# EAGLE board GlucometerV2.2 (EAGLE 7.2.0)
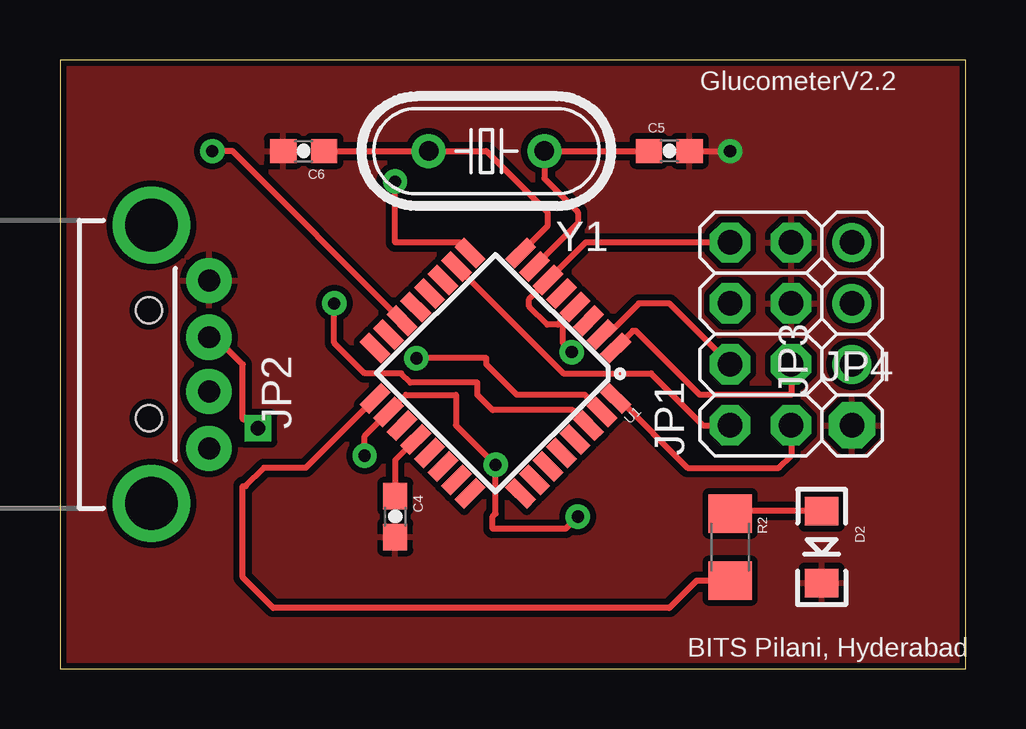
[diagram p0: board, top side]
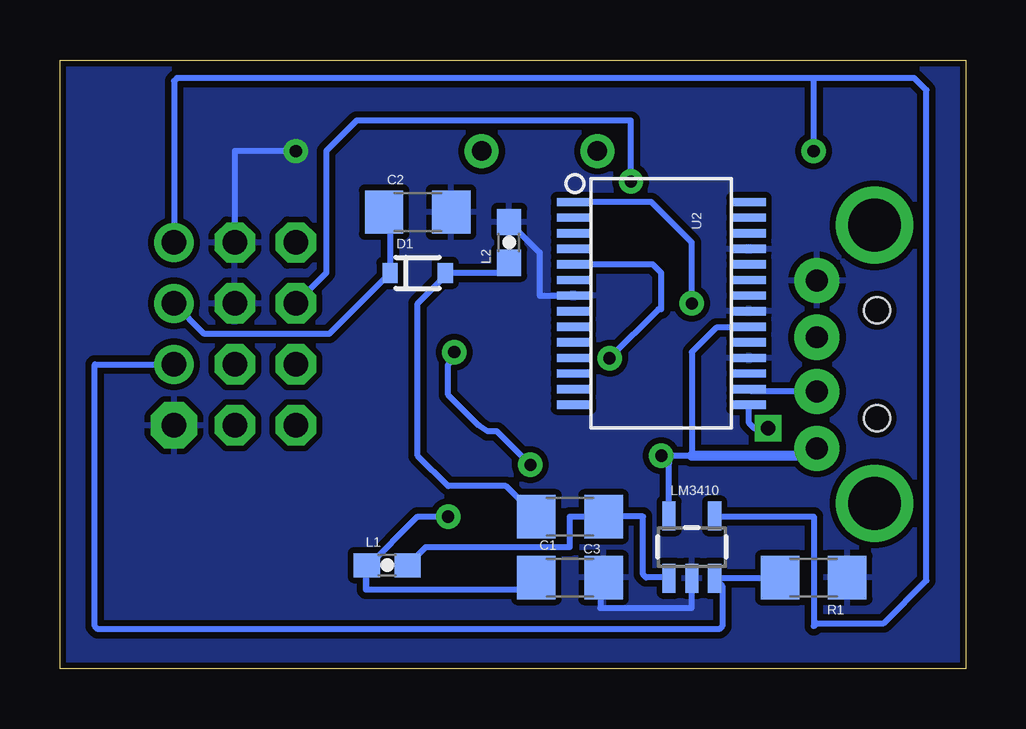
[diagram p1: board, bottom side, seen from below]

Size 37.77 x 25.39 mm. Coordinates in mm from the lower left corner, seen from the top.
Outline: 0,0 37.77,0 37.77,25.39 0,25.39 0,0
Copper layers (1*16): Top 0.035mm / dielectric 1.5mm / Bottom 0.035mm
Design rules "SparkFun": minimum track width 8mil, minimum drill 20mil, track to track 8mil, track to pad 8mil, pad to pad 8mil, via to via 8mil, smd to smd 8mil, copper to edge 8mil, drill to drill 8mil, minimum pad ring 12mil, minimum via ring 10mil, stop-mask expansion 4mil, vias tented up to drill 20mil, thermal gap 10mil

## Footprints (pad centres in the part's own frame; a part is rotated, then mirrored left to right if it is on the bottom)
1206 = smd 1.6 x 1.8: 1 -1.4,0; 2 1.4,0
0603-CAP = smd 1.1 x 1: 1 -0.85,0; 2 0.85,0
SOD-323 = smd 0.63 x 0.83: A 1.15,0; C -1.15,0
LED-1206 = smd 1.2 x 1.4: A -1.5,0; C 1.5,0
2X04 = drill 1.016 pad 1.676 octagon: 1 -3.81,-1.27; 2 -3.81,1.27; 3 -1.27,-1.27; 4 -1.27,1.27; 5 1.27,-1.27; 6 1.27,1.27; 7 3.81,-1.27; 8 3.81,1.27
USB-A-H = drill 0.914 pad 1.88: D+ 2.4,1.127; D- 2.4,-1.127; GND 2.4,3.5; VBUS 2.4,-3.5 | drill 2.2: GND2 0,-5.8; GND3 0,5.8 | hole 1.1: -0.1,2.25; -0.1,-2.25
1X03 = drill 1.016: 1 -2.54,0; 2 0,0; 3 2.54,0
1X01 = drill 1.016 pad 1.93 octagon: 1 0,0
0603 = smd 1.1 x 1: 1 -0.85,0; 2 0.85,0
SOT23-5 = smd 0.55 x 1.2: 1 -0.95,-1.3; 2 0,-1.3; 3 0.95,-1.3; 4 0.95,1.3; 5 -0.95,1.3
TQFP32-08 = smd 1.27 x 0.559: 1 -4.293,2.8; 2 -4.293,2; 3 -4.293,1.2; 4 -4.293,0.4; 5 -4.293,-0.4; 6 -4.293,-1.2; 7 -4.293,-2; 8 -4.293,-2.8; 17 4.293,-2.8; 18 4.293,-2; 19 4.293,-1.2; 20 4.293,-0.4; 21 4.293,0.4; 22 4.293,1.2; 23 4.293,2; 24 4.293,2.8 | smd 0.559 x 1.27: 9 -2.8,-4.293; 10 -2,-4.293; 11 -1.2,-4.293; 12 -0.4,-4.293; 13 0.4,-4.293; 14 1.2,-4.293; 15 2,-4.293; 16 2.8,-4.293; 25 2.8,4.293; 26 2,4.293; 27 1.2,4.293; 28 0.4,4.293; 29 -0.4,4.293; 30 -1.2,4.293; 31 -2,4.293; 32 -2.8,4.293
SSOP28DB = smd 0.348 x 1.397: 1 -4.225,-3.656; 2 -3.575,-3.656; 3 -2.925,-3.656; 4 -2.275,-3.656; 5 -1.625,-3.656; 6 -0.975,-3.656; 7 -0.325,-3.656; 8 0.325,-3.656; 9 0.975,-3.656; 10 1.625,-3.656; 11 2.275,-3.656; 12 2.925,-3.656; 13 3.575,-3.656; 14 4.225,-3.656; 15 4.225,3.656; 16 3.575,3.656; 17 2.925,3.656; 18 2.275,3.656; 19 1.625,3.656; 20 0.975,3.656; 21 0.325,3.656; 22 -0.325,3.656; 23 -0.975,3.656; 24 -1.625,3.656; 25 -2.275,3.656; 26 -2.925,3.656; 27 -3.575,3.656; 28 -4.225,3.656
HC49U-V = drill 0.813: 1 -2.413,0; 2 2.413,0

## Placement (x,y rotation side)
C1  10uF  [1206]  16.51,3.81 0 bottom
C2  10uF  [1206]  22.86,19.05 0 bottom
C3  2.2uF  [1206]  16.51,6.35 180 bottom
C4  0.1uF  [0603-CAP]  13.97,6.35 270 top
C5  0.1uF  [0603-CAP]  25.4,21.59 0 top
C6  0.1uF  [0603-CAP]  10.16,21.59 180 top
D1  5.6V  [SOD-323]  22.86,16.51 0 bottom
D2  RED  [LED-1206]  31.75,5.08 270 top
JP1  [2X04]  29.21,13.97 90 top
JP2  USB-A-H  [USB-A-H]  3.81,12.7 0 top
JP3  [1X03]  33.02,15.24 90 top
JP4  [1X01]  33.02,10.16 0 top
L1  4.7uH  [0603]  24.13,4.32 0 bottom
L2  4.7uH  [0603]  19.05,17.78 90 bottom
LM3410  TC7SU04F  [SOT23-5]  11.43,5.08 0 bottom
R1  [1206]  6.35,3.81 180 bottom
R2  [1206]  27.94,5.08 270 top
U1  ATMEGA328P_TQFP  [TQFP32-08]  18.15,12.33 225 top
U2  FT232RLSSOP  [SSOP28DB]  12.7,15.24 270 bottom
Y1  [HC49U-V]  17.78,21.59 180 top

## Library data of the parts
C1-C3 = SparkFun-Passives
C4-C6 = SparkFun-Capacitors; PROD_ID: CAP-00810
D1 = SparkFun-DiscreteSemi; PROD_ID: DIO-12442
D2 = SparkFun-LED; PROD_ID: DIO-00809
JP1 JP3 JP4 = adafruit
JP2 = SparkFun-Connectors; PROD_ID: CONN-08367
L1 L2 = SparkFun-Passives; PROD_ID: RES-07859
LM3410 = SparkFun-DigitalIC; NOTE: RETIRED; PROD_ID: 8211
R1 R2 = SparkFun-Resistors
U1 = SparkFun-DigitalIC; PROD_ID: IC-09069
U2 = SparkFun-DigitalIC; PROD_ID: IC-00870
Y1 = SparkFun-FreqCtrl

## Nets
D+: JP2.D+ U2.15
D-: JP2.D- U2.16
FB: JP3.1 LM3410.3 R1.2
GND: C1.2 C2.2 C4.2 C5.2 C6.2 D2.C JP1.5 JP1.7 JP2.GND JP4.1 L2.2 LM3410.2 R1.1 U1.3 U1.21 U2.7 U2.18 U2.21 U2.25
IND: R2.2 U1.17
N$1: C4.1 U1.20
N$2: D2.A R2.1
N$3: C5.1 U1.7 Y1.1
N$5: C6.1 U1.8 Y1.2
PWM: JP3.3 LM3410.4 U1.14
RX: U1.30 U2.1
S0: JP1.1 U1.32
S1: JP1.3 U1.1
S2: JP1.4 U1.2
S3: JP1.2 U1.10
SENSOROUT: JP1.6 U1.9
SWITCH: C3.1 L1.2 LM3410.1
TMP0: C3.2 D1.A L2.1
TX: U1.31 U2.5
VCCIO: U2.4
VIN: C1.1 JP1.8 JP2.VBUS L1.1 LM3410.5 U1.4 U1.6 U1.18 U2.20
VOUT: C2.1 D1.C JP3.2

## Tracks (layer width: path | path; a pad name or v marks a point on that pad's centre or on a via)
D+  (via drill 0.6)
  Top 0.254: v8.26,10.03 7.62,10.41 7.62,12.7 6.49,13.83 JP2.D+
  Bottom 0.254: v8.26,10.03 8.82,10.03 9.04,10.25 U2.15
D-
  Bottom 0.254: JP2.D- 8.95,11.57 U2.16
FB
  Bottom 0.254: R1.2 7.78,3.78 LM3410.3 10.16,3.46 10.16,1.78 10.29,1.65 36.2,1.65 36.32,1.78 36.32,12.7 JP3.1
GND  (via drill 0.51)
  Top 0.254: C5.2 v27.94,21.59
  Bottom 0.254: v27.94,21.59 30.48,21.59 JP1.7 | C1.2 15.24,3.68 15.24,2.54 11.43,2.54 LM3410.2 | L2.2 17.78,17.36 17.78,15.56 U2.7
  pour Top (isolate 0.254): 0,25.4 38.1,25.4 38.1,0 0,0
  pour Bottom (isolate 0.254): 0,0 0,25.4 38.1,25.4 38.1,0
IND
  Top 0.254: R2.2 26.54,3.68 25.4,2.54 8.89,2.54 7.62,3.81 7.62,7.62 7.75,7.62 8.51,8.38 10.25,8.38 U1.17
N$1
  Top 0.254: U1.20 13.97,8.71 C4.1
N$2
  Top 0.254: D2.A 28.04,6.58 R2.1
N$3
  Top 0.254: C5.1 Y1.1 20.19,20.45 21.59,19.05 21.59,18.59 U1.7
N$5
  Top 0.254: C6.1 Y1.2 17.78,21.59 20.32,19.05 20.32,18.46 U1.8
PWM  (via drill 0.51)
  Top 0.254: U1.14 7.19,21.59 v6.35,21.59
  Bottom 0.254: LM3410.4 10.45,6.35 6.35,6.35 6.35,1.78 6.22,1.91 3.43,1.91 1.65,3.68 1.65,24.13 2.16,24.64 6.35,24.64 | 6.35,24.64 32.89,24.64 33.02,24.51 JP3.3 | v6.35,21.59 6.35,24.64
RX  (via drill 0.51)
  Top 0.254: U1.30 21.38,10.79 18.03,10.79 17.4,11.43 17.4,11.94 14.61,11.94 14.22,12.32 12.7,12.32 11.43,13.59 v11.43,15.24
  Bottom 0.254: v11.43,15.24 11.43,17.78 13.12,19.46 U2.1
S0
  Top 0.254: JP1.1 30.48,8.89 29.97,8.38 26.16,8.38 23.27,11.27 U1.32
S1
  Top 0.254: JP1.3 30.48,11.43 26.67,11.43 24,14.1 23.88,14.1 U1.1
S2
  Top 0.254: JP1.4 25.4,15.24 24.13,15.24 22.84,13.95 U1.2
S3
  Top 0.254: U1.10 20.99,12.32 24.64,12.32 26.8,10.16 JP1.2
SENSOROUT  (via drill 0.51)
  Top 0.254: U1.9 16.66,17.78 13.97,17.78 v13.97,20.32
  Bottom 0.254: v13.97,20.32 13.97,22.86 25.4,22.86 26.67,21.59 26.67,16.51 JP1.6
SWITCH
  Bottom 0.254: LM3410.1 12.41,3.81 13.33,3.81 13.46,3.94 13.46,6.35 C3.1 16.51,6.35 16.51,5.08 22.52,5.08 L1.2
TMP0
  Bottom 0.254: L2.1 19.47,16.51 D1.A 21.71,16.39 22.86,15.24 22.86,8.89 21.59,7.62 19.18,7.62 C3.2
TX  (via drill 0.51)
  Top 0.254: U1.31 21.88,11.43 19.05,11.43 17.78,12.7 17.78,12.95 v14.86,12.95
  Bottom 0.254: U2.5 13.05,16.87 12.7,16.51 12.7,14.99 12.83,14.99 v14.86,12.95
VIN  (via drill 0.51)
  Top 0.254: JP1.8 21.91,17.78 U1.6 | v12.7,8.89 12.7,9.7 U1.18 14.43,11.43 16.51,11.43 16.51,10.16 v18.16,8.51 18.16,6.48 18.03,6.35 18.03,5.84 21.08,5.84 v21.59,6.35 | U1.4 20.97,14.58 | 20.97,14.58 20.74,14.35 20.32,14.35 19.56,15.11 19.56,15.43 U1.6 | 20.34,16.15 U1.6 | v21.34,13.21 20.97,13.57 20.97,14.58
  Bottom 0.254: LM3410.5 12.38,8.57 v12.7,8.89 11.43,8.89 11.43,13.21 10.41,14.22 9.09,14.22 U2.20 | 24.89,3.3 18.42,3.3 C1.1 | 24.89,3.3 24.98,3.39 L1.1 | v21.34,13.21 21.34,12.95 21.59,12.7 21.59,11.43 20.32,10.16 19.94,9.91 19.56,9.91 v18.16,8.51 | 24.89,3.3 25.02,3.3 25.02,4.19 22.86,6.35 v21.59,6.35
  Bottom 0.406: JP2.VBUS 6.52,8.89 11.43,8.89
VOUT
  Bottom 0.254: C2.1 24.01,18.8 D1.C 26.55,13.97 31.75,13.97 JP3.2

## Text on the board
tPlace: GlucometerV2.2 | BITS Pilani, Hyderabad